# EAGLE board waldo-badge-2015-panel-r1 (EAGLE 5.12)
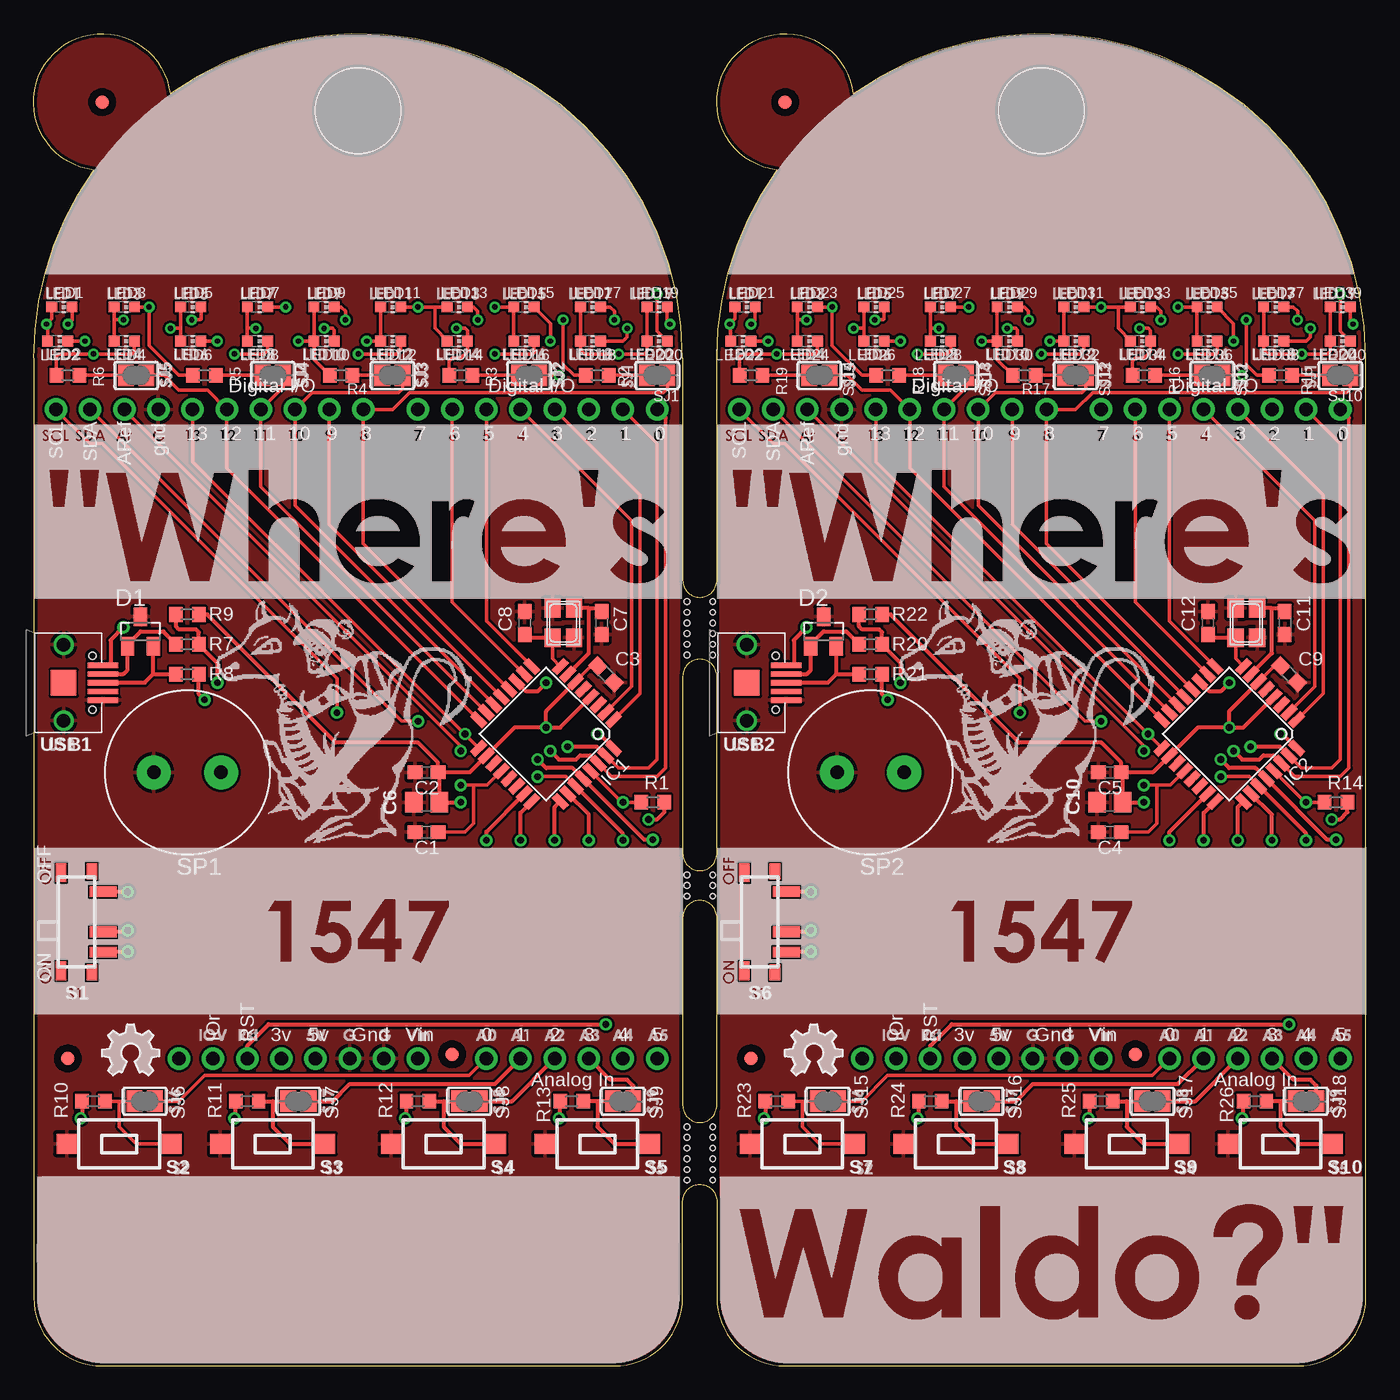
[diagram p0: board, top side]
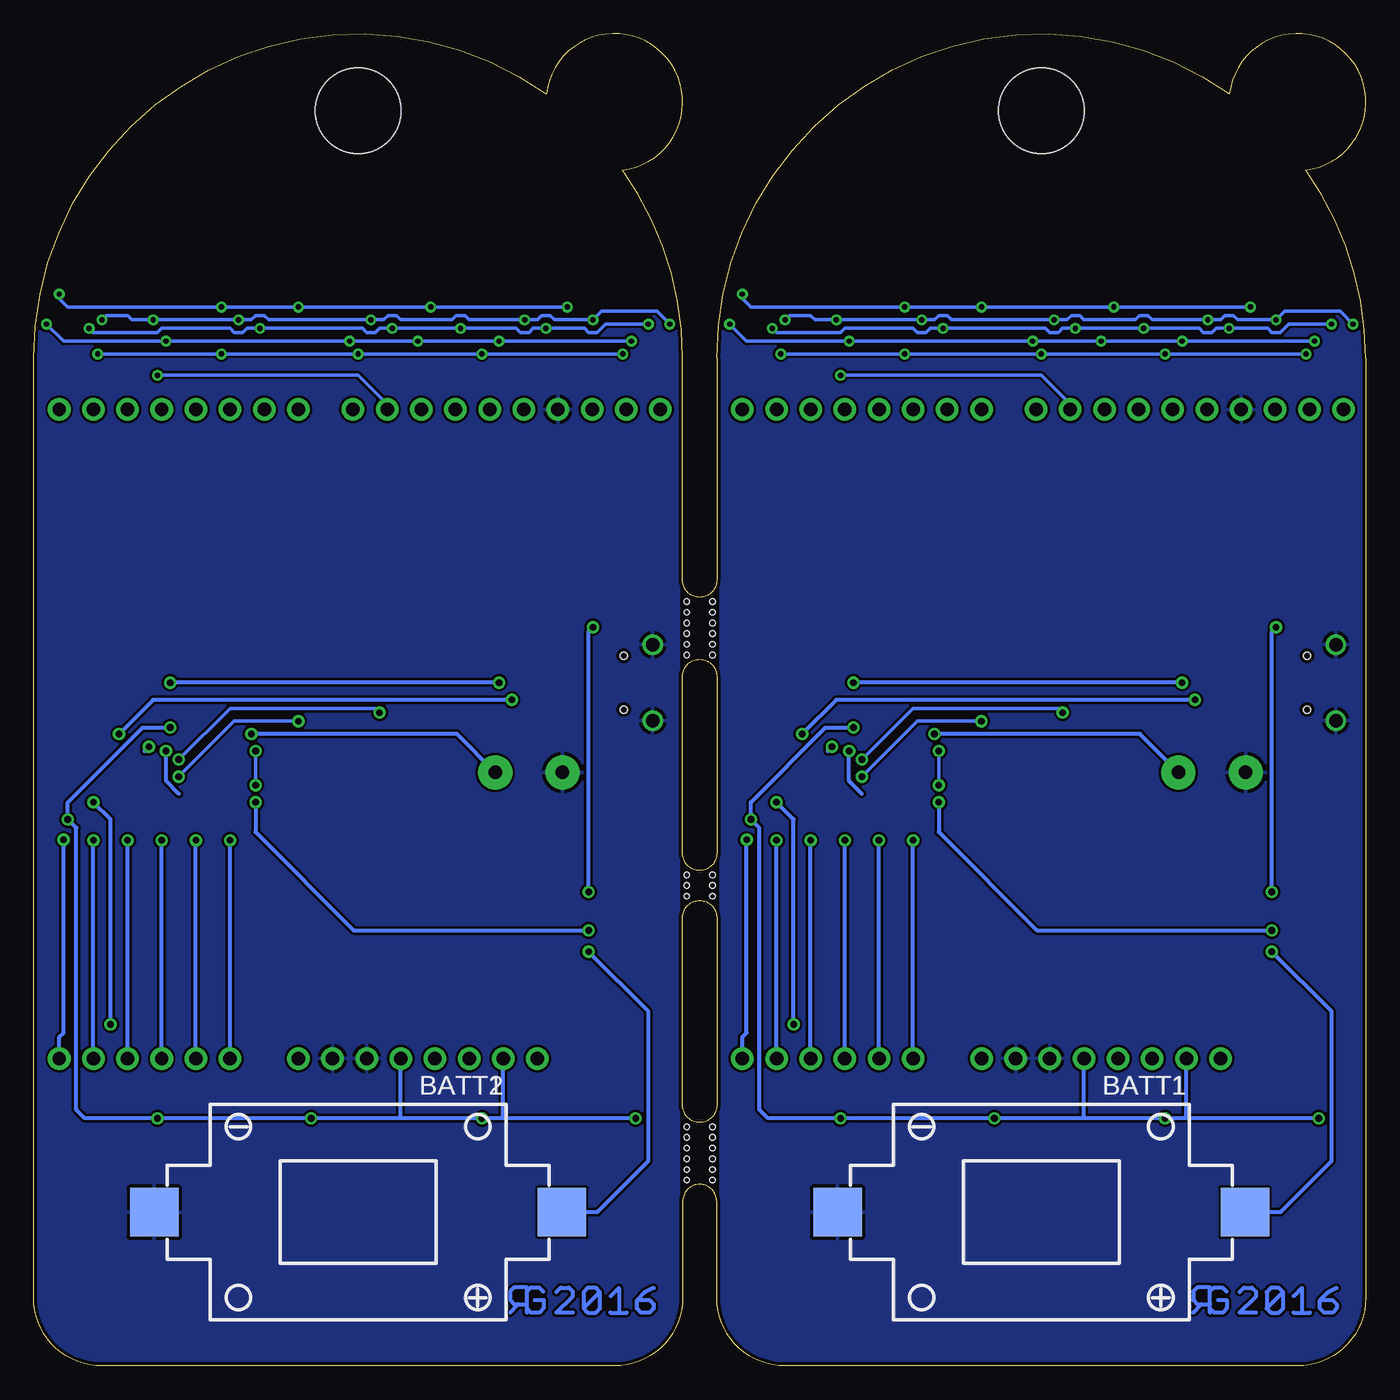
[diagram p1: board, bottom side, seen from below]

Size 99.07 x 99.07 mm. Coordinates in mm from the lower left corner, seen from the top.
Outline: 4.48,88.92 arc35 0.01,74.93 0.01,5.08 arc90 5.09,0 43.19,0 arc90 48.27,5.08 48.27,12.22 arc-90 49.54,13.49 arc-90 50.81,12.22 50.81,5.08 arc90 55.89,0 93.99,0 arc90 99.07,5.08 99.07,74.93 arc125 60.95,94.59
Outline: 10.15,94.59 arc-125 48.27,74.93 48.27,58.42 arc90 49.54,57.15 arc90 50.81,58.42 50.81,74.93 arc-35 55.28,88.92
Outline: 4.48,88.92 arc-256 10.14,94.59
Outline: 55.28,88.92 arc-256 60.94,94.59
Outline: 49.54,52.55 arc90 48.27,51.28 48.27,38.1 arc90 49.54,36.83 arc90 50.81,38.1 50.81,51.28 arc90 49.54,52.55
Outline: 48.27,19.37 arc90 49.54,18.1 arc90 50.81,19.37 50.81,33.34 arc90 49.54,34.61 arc90 48.27,33.34 48.27,19.37
Copper layers (1*16): Top 0.035mm / dielectric 1.5mm / Bottom 0.035mm
Design rules "default *": minimum track width 8mil, minimum drill 0.4mm, track to track 7mil, track to pad 7mil, pad to pad 7mil, via to via 7mil, smd to smd 7mil, copper to edge 10mil, drill to drill 8mil, minimum pad ring 10mil, minimum via ring 8mil, stop-mask expansion 4mil, vias tented up to drill 20mil, thermal gap 10mil
Holes 6.35 mm at 24.14,93.34 74.94,93.34
Holes 0.4 mm at 48.59,56.83 48.59,56.04 48.59,55.24 48.59,54.45 48.59,53.66 50.49,56.83 50.49,56.04 50.49,55.24 50.49,54.45 50.49,53.66 50.49,17.78 50.49,16.99 50.49,16.19 50.49,15.4 50.49,14.61 48.59,17.78 48.59,16.99 48.59,16.19 48.59,15.4 48.59,14.61 48.59,13.81 50.49,13.81 48.59,52.86 50.49,52.86 48.59,36.51 48.59,35.72 48.59,34.92 50.49,36.51 50.49,35.72 50.49,34.92
tRestrict: area 48.1,12.4 to 51,19.2; area 48.1,51.3 to 51,58.3; area 48.1,33.3 to 51,37.9
bRestrict: area 48.1,12.4 to 51,19.2; area 48.1,51.3 to 51,58.3; area 48.1,33.3 to 51,37.9

## Footprints (pad centres in the part's own frame; a part is rotated, then mirrored left to right if it is on the bottom)
2032SMD = smd 3.6 x 3.6: + -15.15,0; - 15.15,0
C0603 = smd 1.1 x 1: 1 -0.85,0; 2 0.85,0
C0805 = smd 1.3 x 1.5: 1 -0.95,0; 2 0.95,0
SOT23 = smd 1 x 1.4: 1 -0.95,-1.1; 2 0.95,-1.1; 3 0,1.1
TQFP32-08 = smd 1.27 x 0.559: 1 -4.293,2.8; 2 -4.293,2; 3 -4.293,1.2; 4 -4.293,0.4; 5 -4.293,-0.4; 6 -4.293,-1.2; 7 -4.293,-2; 8 -4.293,-2.8; 17 4.293,-2.8; 18 4.293,-2; 19 4.293,-1.2; 20 4.293,-0.4; 21 4.293,0.4; 22 4.293,1.2; 23 4.293,2; 24 4.293,2.8 | smd 0.559 x 1.27: 9 -2.8,-4.293; 10 -2,-4.293; 11 -1.2,-4.293; 12 -0.4,-4.293; 13 0.4,-4.293; 14 1.2,-4.293; 15 2,-4.293; 16 2.8,-4.293; 25 2.8,4.293; 26 2,4.293; 27 1.2,4.293; 28 0.4,4.293; 29 -0.4,4.293; 30 -1.2,4.293; 31 -2,4.293; 32 -2.8,4.293
CHIP-LED0603 = smd 0.8 x 0.8: A 0,-0.75; C 0,0.75
NX3225 = smd 1.4 x 1.2: 1 -1.1,0.8; 2 1.1,0.8; 3 1.1,-0.8; 4 -1.1,-0.8
R0603 = smd 1 x 1.1: 1 -0.85,0; 2 0.85,0
SPDT-SMT = smd 2 x 0.8: 1 -2,-2.25; 2 -2,0.75; 3 -2,2.25 | smd 0.8 x 1.2: A -1.15,3.75; D -1.15,-3.75 | smd 0.8 x 1.4: B 1.15,3.65; C 1.15,-3.65
6X3.6-SPST = smd 1.5 x 1.5: 1 -3.9,0; 2 3.9,0
SJ = smd 1.168 x 1.6: 1 -0.762,0; 2 0.762,0
PS12 = drill 1 pad 2.54 round: P$1 -2.5,0; P$2 2.5,0
ARDUINOR3-NOISP = drill 1 pad 1.676 round: 3V 17.78,2.54; 5V 20.32,2.54; A0 33.02,2.54; A1 35.56,2.54; A2 38.1,2.54; A3 40.64,2.54; A4 43.18,2.54; A5 45.72,2.54; AREF 6.096,50.8; D0 45.72,50.8; D1 43.18,50.8; D2 40.64,50.8; D3 38.1,50.8; D4 35.56,50.8; D5 33.02,50.8; D6 30.48,50.8; D7 27.94,50.8; D8 23.876,50.8; D9 21.336,50.8; D10 18.796,50.8; D11 16.256,50.8; D12 13.716,50.8; D13 11.176,50.8; GND 8.636,50.8; GND1 25.4,2.54; GND2 22.86,2.54; IOREF 12.7,2.54; RESERVED 10.16,2.54; RESET 15.24,2.54; SCL 1.016,50.8; SDA 3.556,50.8; VIN 27.94,2.54
FIDUCIAL_1MM = smd 1 x 1: 1 0,0
USB-MICROB-ALI = smd 0.4 x 2.25: D+ 0,2.925; D- -0.65,2.925; GND 1.3,2.925; ID 0.65,2.925; VCC -1.3,2.925 | drill 1 round: GND@0 -2.825,0; GND@1 2.825,0 | smd 1.9 x 1.9: GND@2 0,0 | hole 0.55: -2,2.15; 2,2.15

## Placement (x,y rotation side)
BATT1  2032SMD  [2032SMD]  24.14,11.43 180 bottom
BATT2  2032SMD  [2032SMD]  74.94,11.43 180 bottom
C1  100n  [C0603]  29.22,39.69 180 top
C2  100n  [C0603]  29.22,44.13 180 top
C3  100n  [C0603]  42.55,51.44 315 top
C4  100n  [C0603]  80.02,39.69 180 top
C5  100n  [C0603]  80.02,44.13 180 top
C6  10u  [C0805]  29.22,41.91 180 top
C7  18p  [C0603]  42.24,55.24 270 top
C8  18p  [C0603]  36.52,55.24 90 top
C9  100n  [C0603]  93.35,51.44 315 top
C10  10u  [C0805]  80.02,41.91 180 top
C11  18p  [C0603]  93.04,55.24 270 top
C12  18p  [C0603]  87.32,55.24 90 top
D1  AZ23C3V6-TP  [SOT23]  7.95,54.61 0 top
D2  AZ23C3V6-TP  [SOT23]  58.75,54.61 0 top
IC1  ATMEGA328P-AU  [TQFP32-08]  38.11,46.99 225 top
IC2  ATMEGA328P-AU  [TQFP32-08]  88.91,46.99 225 top
LED1  [CHIP-LED0603]  2.1,78.74 270 top
LED2  [CHIP-LED0603]  1.79,76.2 270 top
LED3  [CHIP-LED0603]  6.74,78.74 270 top
LED4  [CHIP-LED0603]  6.74,76.2 270 top
LED5  [CHIP-LED0603]  11.69,78.74 270 top
LED6  [CHIP-LED0603]  11.69,76.2 270 top
LED7  [CHIP-LED0603]  16.65,78.74 270 top
LED8  [CHIP-LED0603]  16.65,76.2 270 top
LED9  [CHIP-LED0603]  21.6,78.74 270 top
LED10  [CHIP-LED0603]  21.6,76.2 270 top
LED11  [CHIP-LED0603]  26.55,78.74 270 top
LED12  [CHIP-LED0603]  26.55,76.2 270 top
LED13  [CHIP-LED0603]  31.51,78.74 270 top
LED14  [CHIP-LED0603]  31.51,76.2 270 top
LED15  [CHIP-LED0603]  36.46,78.74 270 top
LED16  [CHIP-LED0603]  36.46,76.2 270 top
LED17  [CHIP-LED0603]  41.41,78.74 270 top
LED18  [CHIP-LED0603]  41.41,76.2 270 top
LED19  [CHIP-LED0603]  46.36,78.74 270 top
LED20  [CHIP-LED0603]  46.36,76.2 270 top
LED21  [CHIP-LED0603]  52.9,78.74 270 top
LED22  [CHIP-LED0603]  52.59,76.2 270 top
LED23  [CHIP-LED0603]  57.54,78.74 270 top
LED24  [CHIP-LED0603]  57.54,76.2 270 top
LED25  [CHIP-LED0603]  62.49,78.74 270 top
LED26  [CHIP-LED0603]  62.49,76.2 270 top
LED27  [CHIP-LED0603]  67.45,78.74 270 top
LED28  [CHIP-LED0603]  67.45,76.2 270 top
LED29  [CHIP-LED0603]  72.4,78.74 270 top
LED30  [CHIP-LED0603]  72.4,76.2 270 top
LED31  [CHIP-LED0603]  77.35,78.74 270 top
LED32  [CHIP-LED0603]  77.35,76.2 270 top
LED33  [CHIP-LED0603]  82.31,78.74 270 top
LED34  [CHIP-LED0603]  82.31,76.2 270 top
LED35  [CHIP-LED0603]  87.26,78.74 270 top
LED36  [CHIP-LED0603]  87.26,76.2 270 top
LED37  [CHIP-LED0603]  92.21,78.74 270 top
LED38  [CHIP-LED0603]  92.21,76.2 270 top
LED39  [CHIP-LED0603]  97.16,78.74 270 top
LED40  [CHIP-LED0603]  97.16,76.2 270 top
LOGO1  OSHW_LOGO_FILLX0150-NT  [OSHW_FILLX150_NOTEXT]  5.09,21.59 0 top
LOGO2  OSHW_LOGO_FILLX0150-NT  [OSHW_FILLX150_NOTEXT]  55.89,21.59 0 top
Q1  [NX3225]  39.38,55.24 270 top
Q2  [NX3225]  90.18,55.24 270 top
R1  10K  [R0603]  46.05,41.91 0 top
R2  100  [R0603]  41.92,73.66 180 top
R3  100  [R0603]  31.76,73.66 180 top
R4  100  [R0603]  22.87,73.66 180 top
R5  100  [R0603]  12.71,73.66 180 top
R6  100  [R0603]  2.55,73.66 180 top
R7  60  [R0603]  11.44,53.66 180 top
R8  60  [R0603]  11.44,51.44 180 top
R9  1.5k  [R0603]  11.44,55.88 180 top
R10  10K  [R0603]  4.45,19.68 180 top
R11  10K  [R0603]  15.88,19.68 180 top
R12  10K  [R0603]  28.58,19.68 180 top
R13  10K  [R0603]  40.01,19.68 180 top
R14  10K  [R0603]  96.85,41.91 0 top
R15  100  [R0603]  92.72,73.66 180 top
R16  100  [R0603]  82.56,73.66 180 top
R17  100  [R0603]  73.67,73.66 180 top
R18  100  [R0603]  63.51,73.66 180 top
R19  100  [R0603]  53.35,73.66 180 top
R20  60  [R0603]  62.24,53.66 180 top
R21  60  [R0603]  62.24,51.44 180 top
R22  1.5k  [R0603]  62.24,55.88 180 top
R23  10K  [R0603]  55.25,19.68 180 top
R24  10K  [R0603]  66.68,19.68 180 top
R25  10K  [R0603]  79.38,19.68 180 top
R26  10K  [R0603]  90.81,19.68 180 top
S1  SPDT-SMT  [SPDT-SMT]  3.18,33.02 180 top
S2  TACT-SPSTSMD-6X3.6  [6X3.6-SPST]  6.36,16.51 0 top
S3  TACT-SPSTSMD-6X3.6  [6X3.6-SPST]  17.79,16.51 0 top
S4  TACT-SPSTSMD-6X3.6  [6X3.6-SPST]  30.49,16.51 0 top
S5  TACT-SPSTSMD-6X3.6  [6X3.6-SPST]  41.92,16.51 0 top
S6  SPDT-SMT  [SPDT-SMT]  53.98,33.02 180 top
S7  TACT-SPSTSMD-6X3.6  [6X3.6-SPST]  57.16,16.51 0 top
S8  TACT-SPSTSMD-6X3.6  [6X3.6-SPST]  68.59,16.51 0 top
S9  TACT-SPSTSMD-6X3.6  [6X3.6-SPST]  81.29,16.51 0 top
S10  TACT-SPSTSMD-6X3.6  [6X3.6-SPST]  92.72,16.51 0 top
SJ1  [SJ]  46.36,73.66 180 top
SJ2  [SJ]  36.84,73.66 180 top
SJ3  [SJ]  26.68,73.66 180 top
SJ4  [SJ]  17.79,73.66 180 top
SJ5  [SJ]  7.63,73.66 180 top
SJ6  [SJ]  8.26,19.68 0 top
SJ7  [SJ]  19.69,19.68 0 top
SJ8  [SJ]  32.39,19.68 0 top
SJ9  [SJ]  43.82,19.68 0 top
SJ10  [SJ]  97.16,73.66 180 top
SJ11  [SJ]  87.64,73.66 180 top
SJ12  [SJ]  77.48,73.66 180 top
SJ13  [SJ]  68.59,73.66 180 top
SJ14  [SJ]  58.43,73.66 180 top
SJ15  [SJ]  59.06,19.68 0 top
SJ16  [SJ]  70.49,19.68 0 top
SJ17  [SJ]  83.19,19.68 0 top
SJ18  [SJ]  94.62,19.68 0 top
SP1  SPEAKER/PS12  [PS12]  11.44,44.13 180 top
SP2  SPEAKER/PS12  [PS12]  62.24,44.13 180 top
U1  ARDUINOR3-NOISP  [ARDUINOR3-NOISP]  0.64,20.32 0 top
U2  ARDUINOR3-NOISP  [ARDUINOR3-NOISP]  51.44,20.32 0 top
U$1  [TOQUE_TOP]  24.14,93.34 0 top
U$2  [SILKSCREEN]  0.01,-1.27 0 top
U$3  FIDUCIAL  [FIDUCIAL_1MM]  5.09,93.98 0 top
U$4  FIDUCIAL  [FIDUCIAL_1MM]  55.89,93.98 0 top
U$5  FIDUCIAL  [FIDUCIAL_1MM]  2.55,22.86 0 top
U$6  FIDUCIAL  [FIDUCIAL_1MM]  31.12,23.18 0 top
U$7  [RGLOGO_SMALL_2016]  11.44,3.81 0 bottom
U$8  FIDUCIAL  [FIDUCIAL_1MM]  53.35,22.86 0 top
U$9  [TOQUE_TOP]  74.94,93.34 0 top
U$10  [SILKSCREEN]  50.81,-1.27 0 top
U$11  FIDUCIAL  [FIDUCIAL_1MM]  81.92,23.18 0 top
U$12  [RGLOGO_SMALL_2016]  62.24,3.81 0 bottom
USB1  USB-U  [USB-MICROB-ALI]  2.23,50.8 270 top
USB2  USB-U  [USB-MICROB-ALI]  53.03,50.8 270 top

## Library data of the parts
BATT1 BATT2 = rbg-4ucon-battery
C1-C12 R1-R26 = rcl
D1 D2 = diode
IC1 IC2 = avr-4
LED1-LED40 = led; EAGLEUP: CHIPLED_0603
LOGO1 LOGO2 = ohw-logo
Q1 Q2 SP1 SP2 U$3-U$6 U$8 U$11 = adafruit
S1 S6 = smt-spdt-aliexpress
S2-S5 S7-S10 = rbg-generic-tact-switch
SJ1-SJ18 = jumper
U1 U2 = rbg-arduino-shield
U$1 U$2 U$9 U$10 = artwork
U$7 U$12 = rbg-logos
USB1 USB2 = con-usb-2

## Nets
3V: U1.3V
3V1: U2.3V
+5V: S1.1 USB1.VCC
+5V1: S6.1 USB2.VCC
ANALOG0: IC1.23 SJ6.2 U1.A0
ANALOG1: IC1.24 SJ7.2 U1.A1
ANALOG2: IC1.25 SJ8.2 U1.A2
ANALOG3: IC1.26 SJ9.2 U1.A3
ANALOG4: IC1.27 U1.A4 U1.SDA
ANALOG5: IC1.28 U1.A5 U1.SCL
ANALOG6: IC2.23 SJ15.2 U2.A0
ANALOG7: IC2.24 SJ16.2 U2.A1
ANALOG8: IC2.25 SJ17.2 U2.A2
ANALOG9: IC2.26 SJ18.2 U2.A3
ANALOG10: IC2.27 U2.A4 U2.SDA
ANALOG11: IC2.28 U2.A5 U2.SCL
AREF: C1.1 IC1.20 U1.AREF
AREF1: C4.1 IC2.20 U2.AREF
CHARLIEPLEX1: LED1.A LED2.A LED3.A LED4.A LED5.C LED9.C LED13.C LED17.C R2.2
CHARLIEPLEX2: LED1.C LED5.A LED6.A LED7.A LED8.A LED10.C LED14.C LED18.C R3.2
CHARLIEPLEX3: LED2.C LED6.C LED9.A LED10.A LED11.A LED12.A LED15.C LED19.C R4.2
CHARLIEPLEX4: LED3.C LED7.C LED11.C LED13.A LED14.A LED15.A LED16.A LED20.C R5.2
CHARLIEPLEX5: LED4.C LED8.C LED12.C LED16.C LED17.A LED18.A LED19.A LED20.A R6.2
CHARLIEPLEX6: LED21.A LED22.A LED23.A LED24.A LED25.C LED29.C LED33.C LED37.C R15.2
CHARLIEPLEX7: LED21.C LED25.A LED26.A LED27.A LED28.A LED30.C LED34.C LED38.C R16.2
CHARLIEPLEX8: LED22.C LED26.C LED29.A LED30.A LED31.A LED32.A LED35.C LED39.C R17.2
CHARLIEPLEX9: LED24.C LED28.C LED32.C LED36.C LED37.A LED38.A LED39.A LED40.A R19.2
CHARLIEPLEX10: LED23.C LED27.C LED31.C LED33.A LED34.A LED35.A LED36.A LED40.C R18.2
DIGITAL0: IC1.30 U1.D0
DIGITAL1: IC1.31 U1.D1
DIGITAL2: IC1.32 R8.1
DIGITAL3: IC1.1 U1.D3
DIGITAL4: IC1.2 U1.D4
DIGITAL5: IC1.9 U1.D5
DIGITAL6: IC1.10 U1.D6
DIGITAL7: IC1.11 R7.1 R9.2
DIGITAL8: IC1.12 SJ1.1 U1.D8
DIGITAL9: IC1.13 SJ2.1 U1.D9
DIGITAL10: IC1.14 SJ3.1 U1.D10
DIGITAL11: IC1.15 SJ4.1 U1.D11
DIGITAL12: IC1.16 SJ5.1 U1.D12
DIGITAL13: IC1.17 SP1.P$1 U1.D13
DIGITAL14: IC2.30 U2.D0
DIGITAL15: IC2.31 U2.D1
DIGITAL16: IC2.32 R21.1
DIGITAL17: IC2.1 U2.D3
DIGITAL18: IC2.2 U2.D4
DIGITAL19: IC2.9 U2.D5
DIGITAL20: IC2.10 U2.D6
DIGITAL21: IC2.11 R20.1 R22.2
DIGITAL22: IC2.12 SJ10.1 U2.D8
DIGITAL23: IC2.13 SJ11.1 U2.D9
DIGITAL24: IC2.14 SJ12.1 U2.D10
DIGITAL25: IC2.15 SJ13.1 U2.D11
DIGITAL26: IC2.16 SJ14.1 U2.D12
DIGITAL27: IC2.17 SP2.P$1 U2.D13
GND: BATT1.- C1.2 C2.2 C3.2 C6.2 C7.2 C8.2 D1.3 IC1.3 IC1.5 IC1.21 Q1.2 Q1.4 S2.1 S3.1 S4.1 S5.1 SP1.P$2 U1.GND U1.GND1 U1.GND2 USB1.GND USB1.GND@0 USB1.GND@1
GND1: BATT2.- C4.2 C5.2 C9.2 C10.2 C11.2 C12.2 D2.3 IC2.3 IC2.5 IC2.21 Q2.2 Q2.4 S7.1 S8.1 S9.1 S10.1 SP2.P$2 U2.GND U2.GND1 U2.GND2 USB2.GND USB2.GND@0 USB2.GND@1
N$1: R2.1 SJ1.2
N$3: R3.1 SJ2.2
N$5: R4.1 SJ3.2
N$6: BATT1.+ S1.3
N$7: R5.1 SJ4.2
N$8: D1.2 R8.2 USB1.D+
N$9: R6.1 SJ5.2
N$10: C7.1 IC1.7 Q1.1
N$11: D1.1 R7.2 USB1.D-
N$12: R15.1 SJ10.2
N$16: R10.1 S2.2 SJ6.1
N$17: R11.1 S3.2 SJ7.1
N$18: C8.1 IC1.8 Q1.3
N$19: R12.1 S4.2 SJ8.1
N$20: R13.1 S5.2 SJ9.1
N$25: R16.1 SJ11.2
N$26: R17.1 SJ12.2
N$27: R18.1 SJ13.2
N$28: R19.1 SJ14.2
N$34: C11.1 IC2.7 Q2.1
N$35: C12.1 IC2.8 Q2.3
N$36: D2.2 R21.2 USB2.D+
N$37: D2.1 R20.2 USB2.D-
N$38: R23.1 S7.2 SJ15.1
N$39: R24.1 S8.2 SJ16.1
N$40: R25.1 S9.2 SJ17.1
N$41: R26.1 S10.2 SJ18.1
N$46: BATT2.+ S6.3
RESET: IC1.29 R1.1 U1.RESET
RESET1: IC2.29 R14.1 U2.RESET
VCC: C2.1 C3.1 C6.1 IC1.4 IC1.6 IC1.18 R1.2 R9.1 R10.2 R11.2 R12.2 R13.2 S1.2 U1.5V U1.IOREF
VCC1: C5.1 C9.1 C10.1 IC2.4 IC2.6 IC2.18 R14.2 R22.1 R23.2 R24.2 R25.2 R26.2 S6.2 U2.5V U2.IOREF
VIN: U1.VIN
VIN1: U2.VIN

## Tracks (layer width: path | path; a pad name or v marks a point on that pad's centre or on a via)
+5V  (via drill 0.5)
  Top 0.305: v6.99,35.24 6.97,35.27 S1.1 | USB1.VCC 5.72,52.1 5.72,53.98 v6.68,54.93
  Bottom 0.305: v6.99,35.24 6.99,54.61 v6.68,54.93
+5V1  (via drill 0.5)
  Top 0.305: v57.79,35.24 57.77,35.27 S6.1 | USB2.VCC 56.52,52.1 56.52,53.98 v57.48,54.93
  Bottom 0.305: v57.79,35.24 57.79,54.61 v57.48,54.93
ANALOG0  (via drill 0.5)
  Top 0.254: SJ6.2 10.8,19.68 12.71,21.59 32.39,21.59 U1.A0
  Top 0.305: v33.66,39.08 33.66,39.72 IC1.23
  Bottom 0.305: U1.A0 v33.66,39.08
ANALOG1  (via drill 0.5)
  Top 0.305: v36.2,39.08 36.2,41.12 IC1.24 | U1.A1 34.3,20.95 23.5,20.95 22.23,19.68 SJ7.2
  Bottom 0.305: U1.A1 v36.2,39.08
ANALOG2  (via drill 0.5)
  Top 0.305: v38.74,39.08 38.74,41.55 IC1.25 | U1.A2 35.57,19.68 SJ8.2
  Bottom 0.305: U1.A2 v38.74,39.08
ANALOG3  (via drill 0.5)
  Top 0.305: v41.28,39.08 41.28,40.99 IC1.26 | U1.A3 42.87,21.27 44.14,21.27 44.59,20.83 SJ9.2
  Bottom 0.305: U1.A3 v41.28,39.08
ANALOG4  (via drill 0.5)
  Top 0.254: IC1.27 39.59,43.81 v37.47,43.81 | U1.SDA 27.38,47.94 v28.58,47.94
  Top 0.305: v43.82,39.08 43.82,39.58 IC1.27
  Bottom 0.254: v37.47,43.81 33.35,47.94 v28.58,47.94
  Bottom 0.305: U1.A4 v43.82,39.08
ANALOG5  (via drill 0.5)
  Top 0.254: U1.SCL 4.2,68.58 5.09,68.58 22.55,51.12 v22.55,48.58
  Top 0.305: v37.47,45.09 38.11,44.45 40.08,44.45 IC1.28 45.41,39.12 v46.05,39.12
  Bottom 0.254: v37.47,45.09 33.66,48.9 22.87,48.9 v22.55,48.58
  Bottom 0.305: U1.A5 46.36,24.45 46.05,24.77 v46.05,39.12
ANALOG6  (via drill 0.5)
  Top 0.254: SJ15.2 61.6,19.68 63.51,21.59 83.19,21.59 U2.A0
  Top 0.305: v84.46,39.08 84.46,39.72 IC2.23
  Bottom 0.305: U2.A0 v84.46,39.08
ANALOG7  (via drill 0.5)
  Top 0.305: v87,39.08 87,41.12 IC2.24 | U2.A1 85.1,20.95 74.3,20.95 73.03,19.68 SJ16.2
  Bottom 0.305: U2.A1 v87,39.08
ANALOG8  (via drill 0.5)
  Top 0.305: v89.54,39.08 89.54,41.55 IC2.25 | U2.A2 86.37,19.68 SJ17.2
  Bottom 0.305: U2.A2 v89.54,39.08
ANALOG9  (via drill 0.5)
  Top 0.305: v92.08,39.08 92.08,40.99 IC2.26 | U2.A3 93.67,21.27 94.94,21.27 95.39,20.83 SJ18.2
  Bottom 0.305: U2.A3 v92.08,39.08
ANALOG10  (via drill 0.5)
  Top 0.254: IC2.27 90.39,43.81 v88.27,43.81 | U2.SDA 78.18,47.94 v79.38,47.94
  Top 0.305: v94.62,39.08 94.62,39.58 IC2.27
  Bottom 0.254: v88.27,43.81 84.15,47.94 v79.38,47.94
  Bottom 0.305: U2.A4 v94.62,39.08
ANALOG11  (via drill 0.5)
  Top 0.254: U2.SCL 55,68.58 55.89,68.58 73.35,51.12 v73.35,48.58
  Top 0.305: v88.27,45.09 88.91,44.45 90.88,44.45 IC2.28 96.21,39.12 v96.85,39.12
  Bottom 0.254: v88.27,45.09 84.46,48.9 73.67,48.9 v73.35,48.58
  Bottom 0.305: U2.A5 97.16,24.45 96.85,24.77 v96.85,39.12
AREF  (via drill 0.5)
  Top 0.254: IC1.20 33.73,43.18 32.71,43.18 | 32.71,43.18 v31.76,43.18 | U1.AREF 31.76,46.1 v31.76,45.72 | C1.1 32.08,39.69 32.71,40.32 32.71,43.18
  Bottom 0.254: v31.76,43.18 v31.76,45.72
AREF1  (via drill 0.5)
  Top 0.254: IC2.20 84.53,43.18 83.51,43.18 | 83.51,43.18 v82.56,43.18 | U2.AREF 82.56,46.1 v82.56,45.72 | C4.1 82.88,39.69 83.51,40.32 83.51,43.18
  Bottom 0.254: v82.56,43.18 v82.56,45.72
CHARLIEPLEX1  (via drill 0.4)
  Top 0.254: LED2.A 1.04,77.55 v0.96,77.47 1.35,77.86 LED1.A | R2.2 40.17,73.66 39.38,74.45 v39.38,77.79 | v43.19,77.79 43.19,78.42 42.87,78.74 LED17.C | LED9.C 22.87,78.74 23.19,78.42 v23.19,77.79 | LED13.C 32.71,78.74 33.03,78.42 v33.03,77.79 | LED4.A LED3.A 5.99,77.84 6.04,77.79 v6.68,77.79 | LED5.C 12.44,77.84 12.39,77.79 v11.76,77.79
  Bottom 0.254: v43.19,77.79 42.87,78.11 41.28,78.11 40.97,77.79 v39.38,77.79 v33.03,77.79 32.08,77.79 31.76,78.11 31.12,78.11 30.81,77.79 v23.19,77.79 22.23,77.79 21.92,78.11 21.28,78.11 20.96,77.79 17.15,77.79 16.84,78.11 16.2,78.11 15.88,77.79 v11.76,77.79 10.8,77.79 10.49,78.11 9.85,78.11 9.53,77.79 v6.68,77.79 6.04,78.42 1.91,78.42 v0.96,77.47
CHARLIEPLEX2  (via drill 0.4)
  Top 0.254: R3.2 30.91,74.72 31.12,74.93 31.76,74.93 32.26,75.43 LED14.C 32.26,76.97 32.08,77.15 v31.44,77.15 | 15.9,77.14 LED7.A | 10.94,77.15 LED6.A 10.94,77.01 | 10.94,77.15 LED5.A | 2.56,77.48 2.54,77.48 v2.55,77.47 2.85,77.78 LED1.C | 15.9,77.14 LED8.A | v10.17,77.15 10.94,77.15 | v16.52,77.15 15.91,77.15 15.9,77.14 | LED10.C 22.35,77.04 22.23,77.15 v21.6,77.15 | LED18.C 43.82,76.2 44.14,76.52 v44.14,77.15
  Bottom 0.254: v44.14,77.15 43.82,76.83 39.06,76.83 38.74,77.15 33.66,77.15 33.35,76.83 32.71,76.83 32.39,77.15 v31.44,77.15 23.82,77.15 23.5,76.83 22.87,76.83 22.55,77.15 v21.6,77.15 v16.52,77.15 12.39,77.15 12.07,76.83 11.44,76.83 11.12,77.15 v10.17,77.15 7.31,77.15 6.99,76.83 6.36,76.83 5.72,77.47 v2.55,77.47
CHARLIEPLEX3  (via drill 0.4)
  Top 0.254: LED10.A 20.85,74.83 R4.2 | LED10.A LED9.A | LED11.A LED12.A v24.77,76.2 | v19.69,76.2 LED10.A | LED2.C v3.82,76.2 | v13.66,76.2 LED6.C | LED15.C 38.43,77.52 v38.43,76.2 | LED19.C 47.11,77.67 v47.32,77.47
  Bottom 0.254: v3.82,76.2 v13.66,76.2 v19.69,76.2 v24.77,76.2 v38.43,76.2 46.05,76.2 v47.32,77.47
CHARLIEPLEX4  (via drill 0.4)
  Top 0.254: LED3.C v8.58,78.74 8.58,75.88 10.8,73.66 R5.2 | v46.36,79.69 46.36,76.95 LED20.C | v18.74,78.74 LED7.C | LED11.C v28.58,78.74 29.85,78.74 | 29.85,78.74 LED13.A | v34.3,78.74 LED15.A LED16.A | LED14.A 30.76,76.25 29.85,77.15 29.85,78.74
  Bottom 0.254: v8.58,78.74 v18.74,78.74 v28.58,78.74 v34.3,78.74 45.73,78.74 46.36,79.38 v46.36,79.69
CHARLIEPLEX5  (via drill 0.4)
  Top 0.254: LED19.A LED20.A 45.61,75.45 45.41,75.25 v43.51,75.25 40.97,75.25 40.66,75.55 LED18.A LED17.A | LED4.C 7.49,75.43 7.31,75.25 v4.45,75.25 1.91,75.25 1.7,75.03 R6.2 | LED8.C 17.4,75.49 17.15,75.25 v14.93,75.25 | v24.14,75.25 27,75.25 27.3,75.55 LED12.C | LED16.C 37.21,75.3 37.16,75.25 v34.3,75.25
  Bottom 0.254: v4.45,75.25 v14.93,75.25 v24.14,75.25 v34.3,75.25 v43.51,75.25
CHARLIEPLEX6  (via drill 0.4)
  Top 0.254: LED22.A 51.84,77.55 v51.76,77.47 52.15,77.86 LED21.A | R15.2 90.97,73.66 90.18,74.45 v90.18,77.79 | v93.99,77.79 93.99,78.42 93.67,78.74 LED37.C | LED29.C 73.67,78.74 73.99,78.42 v73.99,77.79 | LED33.C 83.51,78.74 83.83,78.42 v83.83,77.79 | LED24.A LED23.A 56.79,77.84 56.84,77.79 v57.48,77.79 | LED25.C 63.24,77.84 63.19,77.79 v62.56,77.79
  Bottom 0.254: v93.99,77.79 93.67,78.11 92.08,78.11 91.77,77.79 v90.18,77.79 v83.83,77.79 82.88,77.79 82.56,78.11 81.92,78.11 81.61,77.79 v73.99,77.79 73.03,77.79 72.72,78.11 72.08,78.11 71.76,77.79 67.95,77.79 67.64,78.11 67,78.11 66.68,77.79 v62.56,77.79 61.6,77.79 61.29,78.11 60.65,78.11 60.33,77.79 v57.48,77.79 56.84,78.42 52.71,78.42 v51.76,77.47
CHARLIEPLEX7  (via drill 0.4)
  Top 0.254: R16.2 81.71,74.72 81.92,74.93 82.56,74.93 83.06,75.43 LED34.C 83.06,76.97 82.88,77.15 v82.24,77.15 | 66.7,77.14 LED27.A | 61.74,77.15 LED26.A 61.74,77.01 | 61.74,77.15 LED25.A | 53.36,77.48 53.34,77.48 v53.35,77.47 53.65,77.78 LED21.C | 66.7,77.14 LED28.A | v60.97,77.15 61.74,77.15 | v67.32,77.15 66.71,77.15 66.7,77.14 | LED30.C 73.15,77.04 73.03,77.15 v72.4,77.15 | LED38.C 94.62,76.2 94.94,76.52 v94.94,77.15
  Bottom 0.254: v94.94,77.15 94.62,76.83 89.86,76.83 89.54,77.15 84.46,77.15 84.15,76.83 83.51,76.83 83.19,77.15 v82.24,77.15 74.62,77.15 74.3,76.83 73.67,76.83 73.35,77.15 v72.4,77.15 v67.32,77.15 63.19,77.15 62.87,76.83 62.24,76.83 61.92,77.15 v60.97,77.15 58.11,77.15 57.79,76.83 57.16,76.83 56.52,77.47 v53.35,77.47
CHARLIEPLEX8  (via drill 0.4)
  Top 0.254: LED30.A 71.65,74.83 R17.2 | LED30.A LED29.A | LED31.A LED32.A v75.57,76.2 | v70.49,76.2 LED30.A | LED22.C v54.62,76.2 | v64.46,76.2 LED26.C | LED35.C 89.23,77.52 v89.23,76.2 | LED39.C 97.91,77.67 v98.12,77.47
  Bottom 0.254: v54.62,76.2 v64.46,76.2 v70.49,76.2 v75.57,76.2 v89.23,76.2 96.85,76.2 v98.12,77.47
CHARLIEPLEX9  (via drill 0.4)
  Top 0.254: LED39.A LED40.A 96.41,75.45 96.21,75.25 v94.31,75.25 91.77,75.25 91.46,75.55 LED38.A LED37.A | LED24.C 58.29,75.43 58.11,75.25 v55.25,75.25 52.71,75.25 52.5,75.03 R19.2 | LED28.C 68.2,75.49 67.95,75.25 v65.73,75.25 | v74.94,75.25 77.8,75.25 78.1,75.55 LED32.C | LED36.C 88.01,75.3 87.96,75.25 v85.1,75.25
  Bottom 0.254: v55.25,75.25 v65.73,75.25 v74.94,75.25 v85.1,75.25 v94.31,75.25
CHARLIEPLEX10  (via drill 0.4)
  Top 0.254: LED23.C v59.38,78.74 59.38,75.88 61.6,73.66 R18.2 | v97.16,79.69 97.16,76.95 LED40.C | v69.54,78.74 LED27.C | LED31.C v79.38,78.74 80.65,78.74 | 80.65,78.74 LED33.A | v85.1,78.74 LED35.A LED36.A | LED34.A 81.56,76.25 80.65,77.15 80.65,78.74
  Bottom 0.254: v59.38,78.74 v69.54,78.74 v79.38,78.74 v85.1,78.74 96.53,78.74 97.16,79.38 v97.16,79.69
DIGITAL0  (via drill 0.5)
  Top 0.254: IC1.30 42.98,43.81 46.36,43.81 47,44.45 47,70.48
  Top 0.305: 47,70.48 U1.D0 | v38.43,45.72 39.06,45.09 40.33,45.09 40.65,45.4 41.39,45.4 IC1.30
  Bottom 0.305: 37.47,42.55 38.43,43.5 v38.43,45.72
DIGITAL1  (via drill 0.5)
  Top 0.254: IC1.31 43.48,44.45 45.73,44.45 46.36,45.09 46.36,68.58 U1.D1
  Top 0.305: v39.7,46.04 41.89,46.04 IC1.31
  Bottom 0.305: v39.7,46.04 40.01,45.72
DIGITAL2  (via drill 0.5)
  Top 0.305: v41.92,46.99 42.07,46.99 IC1.32 | R8.1 12.29,49.95 v12.71,49.53
  Bottom 0.305: v12.71,49.53 39.38,49.53 v41.92,46.99
DIGITAL3
  Top 0.254: IC1.1 45.09,50.02 45.09,64.77 U1.D3
DIGITAL4
  Top 0.254: IC1.2 44.46,50.51 44.46,62.87 U1.D4
DIGITAL5
  Top 0.254: U1.D5 33.66,55.4 IC1.9
DIGITAL6
  Top 0.254: U1.D6 31.12,56.8 IC1.10
DIGITAL7  (via drill 0.5)
  Top 0.305: IC1.11 36.63,50.16 37.47,50.16 v38.11,50.8 | R9.2 10.59,54.98 10.8,54.77 12.07,54.77 12.29,54.55 R7.1 13.66,52.28 v13.66,50.8
  Bottom 0.305: v13.66,50.8 v38.11,50.8
DIGITAL8
  Top 0.254: IC1.12 24.52,61.15 U1.D8 26.68,71.12 27.95,72.39 46.84,72.39 47.13,72.68 SJ1.1
DIGITAL9  (via drill 0.4)
  Top 0.254: U1.D9 21.98,62.55 IC1.13 | v39.06,73.66 SJ2.1
  Bottom 0.254: U1.D9 21.98,71.5 24.14,73.66 v39.06,73.66
DIGITAL10
  Top 0.254: IC1.14 19.44,63.96 U1.D10 20.71,72.39 27.16,72.39 27.44,72.68 SJ3.1
DIGITAL11
  Top 0.254: IC1.15 16.9,65.37 U1.D11 18.55,72.77 SJ4.1
DIGITAL12
  Top 0.254: IC1.16 14.36,66.78 U1.D12 12.93,72.55 10.8,72.55 9.69,73.66 SJ5.1
DIGITAL13  (via drill 0.5)
  Top 0.254: U1.D13 11.82,67.21 32.04,46.99 v32.08,46.99 | 32.08,46.95 IC1.17
  Top 0.305: v32.08,46.99 32.08,46.95
  Bottom 0.305: v32.08,46.99 16.8,46.99 SP1.P$1
DIGITAL14  (via drill 0.5)
  Top 0.254: IC2.30 93.78,43.81 97.16,43.81 97.8,44.45 97.8,70.48
  Top 0.305: 97.8,70.48 U2.D0 | v89.23,45.72 89.86,45.09 91.13,45.09 91.45,45.4 92.19,45.4 IC2.30
  Bottom 0.305: 88.27,42.55 89.23,43.5 v89.23,45.72
DIGITAL15  (via drill 0.5)
  Top 0.254: IC2.31 94.28,44.45 96.53,44.45 97.16,45.09 97.16,68.58 U2.D1
  Top 0.305: v90.5,46.04 92.69,46.04 IC2.31
  Bottom 0.305: v90.5,46.04 90.81,45.72
DIGITAL16  (via drill 0.5)
  Top 0.305: v92.72,46.99 92.87,46.99 IC2.32 | R21.1 63.09,49.95 v63.51,49.53
  Bottom 0.305: v63.51,49.53 90.18,49.53 v92.72,46.99
DIGITAL17
  Top 0.254: IC2.1 95.89,50.02 95.89,64.77 U2.D3
DIGITAL18
  Top 0.254: IC2.2 95.26,50.51 95.26,62.87 U2.D4
DIGITAL19
  Top 0.254: U2.D5 84.46,55.4 IC2.9
DIGITAL20
  Top 0.254: U2.D6 81.92,56.8 IC2.10
DIGITAL21  (via drill 0.5)
  Top 0.305: IC2.11 87.43,50.16 88.27,50.16 v88.91,50.8 | R22.2 61.39,54.98 61.6,54.77 62.87,54.77 63.09,54.55 R20.1 64.46,52.28 v64.46,50.8
  Bottom 0.305: v64.46,50.8 v88.91,50.8
DIGITAL22
  Top 0.254: IC2.12 75.32,61.15 U2.D8 77.48,71.12 78.75,72.39 97.64,72.39 97.93,72.68 SJ10.1
DIGITAL23  (via drill 0.4)
  Top 0.254: U2.D9 72.78,62.55 IC2.13 | v89.86,73.66 SJ11.1
  Bottom 0.254: U2.D9 72.78,71.5 74.94,73.66 v89.86,73.66
DIGITAL24
  Top 0.254: IC2.14 70.24,63.96 U2.D10 71.51,72.39 77.96,72.39 78.24,72.68 SJ12.1
DIGITAL25
  Top 0.254: IC2.15 67.7,65.37 U2.D11 69.35,72.77 SJ13.1
DIGITAL26
  Top 0.254: IC2.16 65.16,66.78 U2.D12 63.73,72.55 61.6,72.55 60.49,73.66 SJ14.1
DIGITAL27  (via drill 0.5)
  Top 0.254: U2.D13 62.62,67.21 82.84,46.99 v82.88,46.99 | 82.88,46.95 IC2.17
  Top 0.305: v82.88,46.99 82.88,46.95
  Bottom 0.305: v82.88,46.99 67.6,46.99 SP2.P$1
GND
  pour Top: -1.26,100.33 50.81,100.33 50.81,-1.27 -1.26,-1.27
  pour Bottom: -1.26,100.33 50.81,100.33 50.81,-1.27 -1.26,-1.27
GND1
  pour Top: 49.54,100.33 101.61,100.33 101.61,-1.27 49.54,-1.27
  pour Bottom: 49.54,100.33 101.61,100.33 101.61,-1.27 49.54,-1.27
N$1
  Top 0.254: R2.1 SJ1.2
N$2
  Top 0.203: 17.15,73.66 18.42,73.66
N$3
  Top 0.254: R3.1 SJ2.2
N$4
  Top 0.203: 6.99,73.66 8.26,73.66
N$5
  Top 0.254: R4.1 SJ3.2
N$6  (via drill 0.5)
  Top 0.305: v6.99,30.8 6.97,30.77 S1.3
  Bottom 0.305: BATT1.+ 6.36,11.43 2.55,15.24 2.55,26.35 v6.99,30.8
N$7
  Top 0.254: R5.1 SJ4.2
N$8
  Top 0.254: D1.2
  Top 0.305: 8.9,51.44 D1.2 | 8.9,51.44 R8.2 | USB1.D+ 8.26,50.8 8.9,51.44
N$9
  Top 0.254: R6.1 SJ5.2
N$10
  Top 0.305: 41.28,56.34 Q1.1 | 41.28,56.34 41.99,56.34 C7.1 | IC1.7 41.28,52.99 41.28,56.34
N$11
  Top 0.305: USB1.D- 6.69,51.45 6.99,51.75 D1.1 7,53.66 7.95,54.61 9.64,54.61 R7.2
N$12
  Top 0.254: R15.1 SJ10.2
N$13
  Top 0.203: 27.31,73.66 26.04,73.66
N$14
  Top 0.203: 37.47,73.66 36.2,73.66
N$15
  Top 0.203: 47,73.66 45.73,73.66
N$16
  Top 0.254: S2.2 7.63,16.51 6.36,17.78 6.36,19.68 | 6.36,19.68 R10.1 | SJ6.1 6.36,19.68
N$17
  Top 0.305: S3.2 19.06,16.51 17.79,17.78 17.79,19.68 | R11.1 17.79,19.68 | 17.79,19.68 SJ7.1
N$18
  Top 0.254: IC1.8 38.58,52.59 Q1.3
  Top 0.305: Q1.3 36.77,54.15 C8.1
N$19
  Top 0.305: S4.2 31.76,16.51 30.49,17.78 30.49,19.68 | R12.1 30.49,19.68 | 30.49,19.68 SJ8.1
N$20
  Top 0.305: S5.2 43.19,16.51 41.92,17.78 41.92,19.68 | 41.92,19.68 R13.1 | SJ9.1 41.92,19.68
N$21
  Top 0.203: 19.06,19.68 20.33,19.68
N$22
  Top 0.203: 31.76,19.68 33.03,19.68
N$23
  Top 0.203: 7.63,19.68 8.9,19.68
N$24
  Top 0.203: 43.19,19.68 44.46,19.68
N$25
  Top 0.254: R16.1 SJ11.2
N$26
  Top 0.254: R17.1 SJ12.2
N$27
  Top 0.254: R18.1 SJ13.2
N$28
  Top 0.254: R19.1 SJ14.2
N$29
  Top 0.203: 57.79,73.66 59.06,73.66
N$30
  Top 0.203: 67.95,73.66 69.22,73.66
N$31
  Top 0.203: 78.11,73.66 76.84,73.66
N$32
  Top 0.203: 88.27,73.66 87,73.66
N$33
  Top 0.203: 97.8,73.66 96.53,73.66
N$34
  Top 0.305: 92.08,56.34 Q2.1 | 92.08,56.34 92.79,56.34 C11.1 | IC2.7 92.08,52.99 92.08,56.34
N$35
  Top 0.254: IC2.8 89.38,52.59 Q2.3
  Top 0.305: Q2.3 87.57,54.15 C12.1
N$36
  Top 0.254: D2.2
  Top 0.305: 59.7,51.44 D2.2 | 59.7,51.44 R21.2 | USB2.D+ 59.06,50.8 59.7,51.44
N$37
  Top 0.305: USB2.D- 57.49,51.45 57.79,51.75 D2.1 57.8,53.66 58.75,54.61 60.44,54.61 R20.2
N$38
  Top 0.254: S7.2 58.43,16.51 57.16,17.78 57.16,19.68 | 57.16,19.68 R23.1 | SJ15.1 57.16,19.68
N$39
  Top 0.305: S8.2 69.86,16.51 68.59,17.78 68.59,19.68 | R24.1 68.59,19.68 | 68.59,19.68 SJ16.1
N$40
  Top 0.305: S9.2 82.56,16.51 81.29,17.78 81.29,19.68 | R25.1 81.29,19.68 | 81.29,19.68 SJ17.1
N$41
  Top 0.305: S10.2 93.99,16.51 92.72,17.78 92.72,19.68 | 92.72,19.68 R26.1 | SJ18.1 92.72,19.68
N$42
  Top 0.203: 58.43,19.68 59.7,19.68
N$43
  Top 0.203: 69.86,19.68 71.13,19.68
N$44
  Top 0.203: 82.56,19.68 83.83,19.68
N$45
  Top 0.203: 93.99,19.68 95.26,19.68
N$46  (via drill 0.5)
  Top 0.305: v57.79,30.8 57.77,30.77 S6.3
  Bottom 0.305: BATT2.+ 57.16,11.43 53.35,15.24 53.35,26.35 v57.79,30.8
RESET  (via drill 0.5)
  Top 0.254: IC1.29 43.76,41.91 v43.82,41.91 R1.1
  Top 0.305: v42.55,25.4 17.47,25.4 15.88,23.81 U1.RESET
  Bottom 0.305: v42.55,25.4 42.55,40.64 v43.82,41.91
RESET1  (via drill 0.5)
  Top 0.254: IC2.29 94.56,41.91 v94.62,41.91 R14.1
  Top 0.305: v93.35,25.4 68.27,25.4 66.68,23.81 U2.RESET
  Bottom 0.305: v93.35,25.4 93.35,40.64 v94.62,41.91
VCC  (via drill 0.5)
  Top 0.254: IC1.6 41.46,52.04 C3.1
  Top 0.305: IC1.6 38.11,48.69 v38.11,47.47 | IC1.4 39.15,47.47 v38.11,47.47 | v38.11,47.47 35.76,47.47 IC1.18 32.42,44.13 C2.1 | R9.1 12.92,55.88 22.45,46.35 28.58,46.35 30.07,44.87 C2.1 | R13.2 39.16,18.52 v39.06,18.41 | v3.5,18.41 3.6,18.52 R10.2 | R11.2 15.03,18.52 v14.93,18.41 | R12.2 27.73,18.52 v27.63,18.41 | S1.2 6.88,32.27 v6.99,32.38 | v31.76,41.91 C6.1 30.17,44.03 C2.1 | R1.2 46.9,41.17 46.36,40.64 v45.73,40.64
  Bottom 0.305: 40.17,47.47 v38.11,47.47 | v3.5,18.41 13.34,18.41 | 13.34,18.41 v14.93,18.41 20.96,18.41 | 20.96,18.41 v27.63,18.41 v39.06,18.41 44.46,18.41 45.09,19.05 45.09,40.01 v45.73,40.64 45.73,41.91 40.17,47.47 | 13.34,18.41 U1.IOREF | 20.96,18.41 U1.5V | v6.99,32.38 24.46,32.38 31.76,39.69 v31.76,41.91 | 40.17,47.47
VCC1  (via drill 0.5)
  Top 0.254: IC2.6 92.26,52.04 C9.1
  Top 0.305: IC2.6 88.91,48.69 v88.91,47.47 | IC2.4 89.95,47.47 v88.91,47.47 | v88.91,47.47 86.56,47.47 IC2.18 83.22,44.13 C5.1 | R22.1 63.72,55.88 73.25,46.35 79.38,46.35 80.87,44.87 C5.1 | R26.2 89.96,18.52 v89.86,18.41 | v54.3,18.41 54.4,18.52 R23.2 | R24.2 65.83,18.52 v65.73,18.41 | R25.2 78.53,18.52 v78.43,18.41 | S6.2 57.68,32.27 v57.79,32.38 | v82.56,41.91 C10.1 80.97,44.03 C5.1 | R14.2 97.7,41.17 97.16,40.64 v96.53,40.64
  Bottom 0.305: 90.97,47.47 v88.91,47.47 | v54.3,18.41 64.14,18.41 | 64.14,18.41 v65.73,18.41 71.76,18.41 | 71.76,18.41 v78.43,18.41 v89.86,18.41 95.26,18.41 95.89,19.05 95.89,40.01 v96.53,40.64 96.53,41.91 90.97,47.47 | 64.14,18.41 U2.IOREF | 71.76,18.41 U2.5V | v57.79,32.38 75.26,32.38 82.56,39.69 v82.56,41.91 | 90.97,47.47

## Text on the board
tNames: OFF | ON
_bsilk: BATT1 | BATT1